# EAGLE board dac-board (EAGLE 9.5.1)
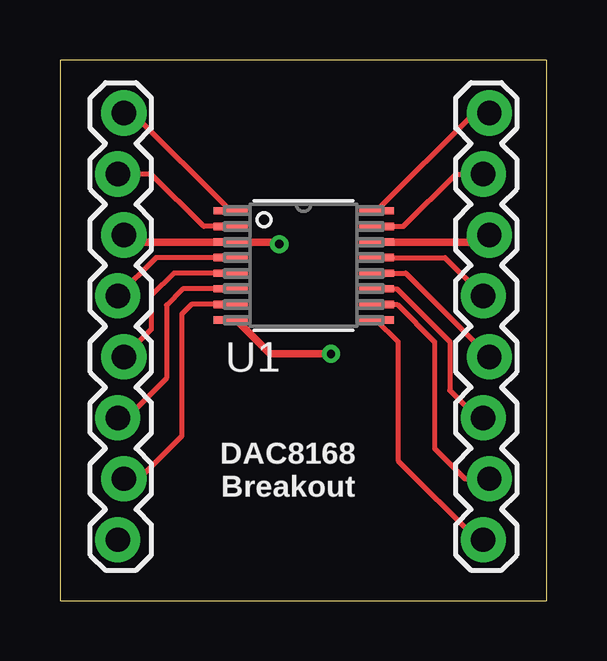
[diagram p0: board, top side]
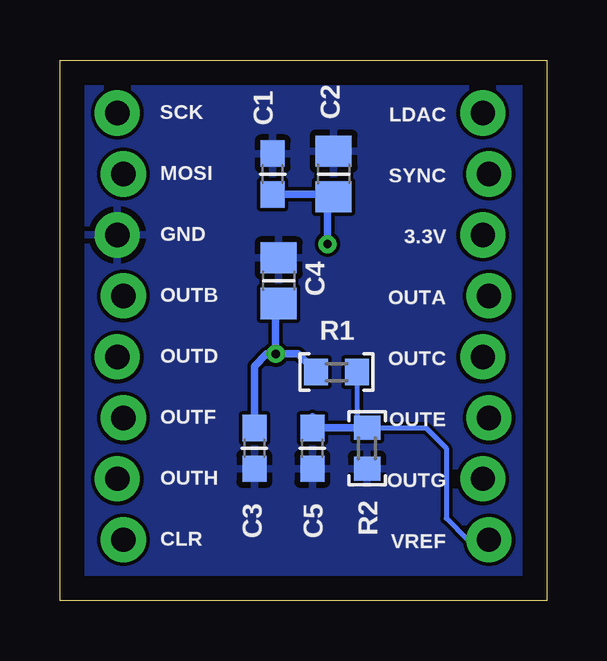
[diagram p1: board, bottom side, seen from below]

Size 20.3 x 22.53 mm. Coordinates in mm from the lower left corner, seen from the top.
Outline: 0,0 20.3,0 20.3,22.53 0,22.53 0,0
Copper layers (1*16): Top 0.035mm / dielectric 1.5mm / Bottom 0.035mm
Design rules "default": minimum track width 6mil, minimum drill 0.35mm, track to track 6mil, track to pad 6mil, pad to pad 6mil, via to via 6mil, smd to smd 6mil, copper to edge 40mil, drill to drill 6mil, minimum pad ring 10mil, minimum via ring 8mil, stop-mask expansion 4mil, vias tented up to drill 0mil, thermal gap 10mil

## Footprints (pad centres in the part's own frame; a part is rotated, then mirrored left to right if it is on the bottom)
C0603 = smd 1.1 x 1: 1 -0.85,0; 2 0.85,0
C0805 = smd 1.3 x 1.5: 1 -0.95,0; 2 0.95,0
1X08_LOCK = drill 1.016 pad 1.88: 1 0,0.127; 2 2.54,-0.127; 3 5.08,0.127; 4 7.62,-0.127; 5 10.16,0.127; 6 12.7,-0.127; 7 15.24,0.127; 8 17.78,-0.127
R0603 = smd 1 x 1.1: 1 -0.85,0; 2 0.85,0
PW16-L = smd 1.422 x 0.305: 1 -3.048,2.275; 2 -3.048,1.625; 3 -3.048,0.975; 4 -3.048,0.325; 5 -3.048,-0.325; 6 -3.048,-0.975; 7 -3.048,-1.625; 8 -3.048,-2.275; 9 3.048,-2.275; 10 3.048,-1.625; 11 3.048,-0.975; 12 3.048,-0.325; 13 3.048,0.325; 14 3.048,0.975; 15 3.048,1.625; 16 3.048,2.275

## Placement (x,y rotation side)
C1  100n  [C0603]  11.43,17.78 90 bottom
C2  2.2u  [C0805]  8.89,17.78 90 bottom
C3  150n  [C0603]  12.19,6.35 270 bottom
C4  2.2u  [C0805]  11.18,13.34 90 bottom
C5  100n  [C0603]  9.78,6.35 270 bottom
J1  [1X08_LOCK]  2.54,2.54 90 top
J2  [1X08_LOCK]  17.78,2.54 90 top
R1  [R0603]  8.76,9.53 180 bottom
R2  [R0603]  7.49,6.35 90 bottom
U1  DAC8168ICPWPW16-L  [PW16-L]  10.16,13.97 0 top

## Library data of the parts
C1-C5 R1 R2 = 0000-master
J1 J2 = SparkFun-Connectors
U1 = 0000-master; BUILT_BY: EMA_UL_Team; MANUFACTURER_PART_NUMBER: DAC8168ICPW; VENDOR: Texas Instruments

## Nets
CLR: J2.1 U1.9
LDAC: J1.8 U1.1
MOSI: J2.7 U1.15
OUT_A: J1.5 U1.4
OUT_B: J2.5 U1.13
OUT_C: J1.4 U1.5
OUT_D: J2.4 U1.12
OUT_E: J1.3 U1.6
OUT_F: J2.3 U1.11
OUT_G: J1.2 U1.7
OUT_H: J2.2 U1.10
PE: C1.2 C2.2 C3.2 C4.2 C5.2 J2.6 R2.1 U1.14
SCK: J2.8 U1.16
SYNC: J1.7 U1.2
VDD: C1.1 C2.1 J1.6 U1.3
VREF: C3.1 C4.1 R1.2 U1.8
VREF_OUT: C5.1 J1.1 R1.1 R2.2

## Tracks (layer width: path | path; a pad name or v marks a point on that pad's centre or on a via)
CLR
  Top 0.203: U1.9 14.1,10.81 14.1,5.84 17.4,2.54 J2.1
LDAC
  Top 0.203: U1.1 3.04,20.32 J1.8
MOSI
  Top 0.203: U1.15 14.32,15.6 16.51,17.78 J2.7
OUT_A
  Top 0.203: U1.4 4.01,14.29 J1.5
OUT_B
  Top 0.203: U1.13 16.06,14.29 J2.5
OUT_C
  Top 0.203: U1.5 4.75,13.64 3.81,12.7 3.81,11.3 J1.4
OUT_D
  Top 0.203: U1.12 14.42,13.64 J2.4
OUT_E
  Top 0.203: U1.6 5.12,12.99 4.45,12.32 4.45,9.27 2.79,7.62 J1.3
OUT_F
  Top 0.203: U1.11 14.06,12.99 16.26,10.79 16.26,8.76 17.4,7.62 J2.3
OUT_G
  Top 0.203: U1.7 5.49,12.35 5.08,11.94 5.08,6.86 3.3,5.08 J1.2
OUT_H
  Top 0.203: U1.10 14.07,12.35 15.62,10.79 15.62,6.35 16.89,5.08 J2.2
PE
  Top 0.305: U1.14 17.61,14.95 J2.6
  pour Bottom: 0,0 0,22.86 20.32,22.86 20.32,0
SCK
  Top 0.203: U1.16 17.28,20.32 J2.8
SYNC
  Top 0.203: U1.2 6,15.6 3.81,17.78 J1.7
VDD  (via drill 0.35)
  Top 0.305: v9.14,14.86 9.06,14.95 U1.3 2.96,14.95 J1.6
  Bottom 0.305: C2.1 9.14,16.44 v9.14,14.86 9.14,16.93 C1.1
VREF  (via drill 0.35)
  Top 0.305: U1.8 7.36,11.7 8.76,10.29 v11.3,10.29
  Bottom 0.305: v11.3,10.29 10.38,10.29 R1.2 | v11.3,10.29 11.68,10.29 12.19,9.78 C3.1 | v11.3,10.29 11.3,12.26 C4.1
VREF_OUT
  Bottom 0.203: J1.1 3.3,2.54 4.19,3.43 4.19,6.35 5.04,7.2 R2.2 7.91,7.2 R1.1
  Bottom 0.305: 9.78,7.66 C5.1 R2.2

## Text on the board
tPlace: DAC8168 / Breakout
bPlace: LDAC | SCK | SYNC | MOSI | 3.3V | GND | OUTA | OUTB | OUTC | OUTD | OUTE | OUTF | OUTG | OUTH | VREF | CLR